# Altium PCB ASR_v2_pcb.PcbDoc
Units mm, origin at the board's own origin, x right, y up, seen from the top; angles counter-clockwise.
Board outline 24 x 105 mm, 2 copper layers (Top Layer, Bottom Layer); 36 components, 27 nets, 99 pads, 34 vias.
Unrouted connection lines stored in the file: 3.
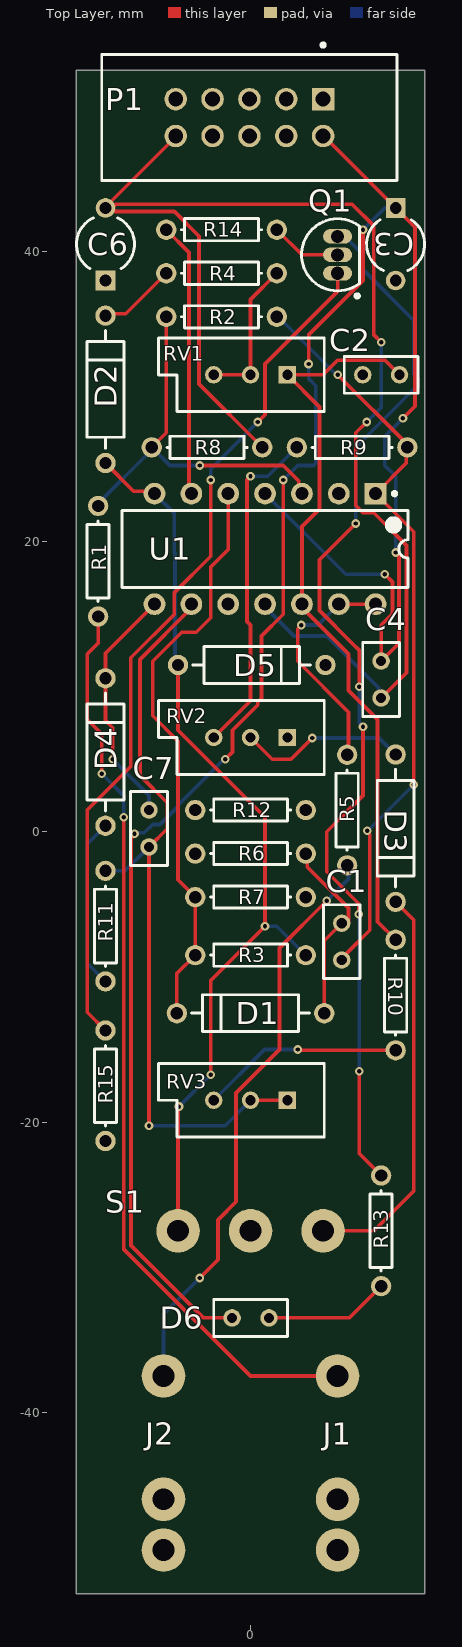
[diagram p0: Top Layer view]
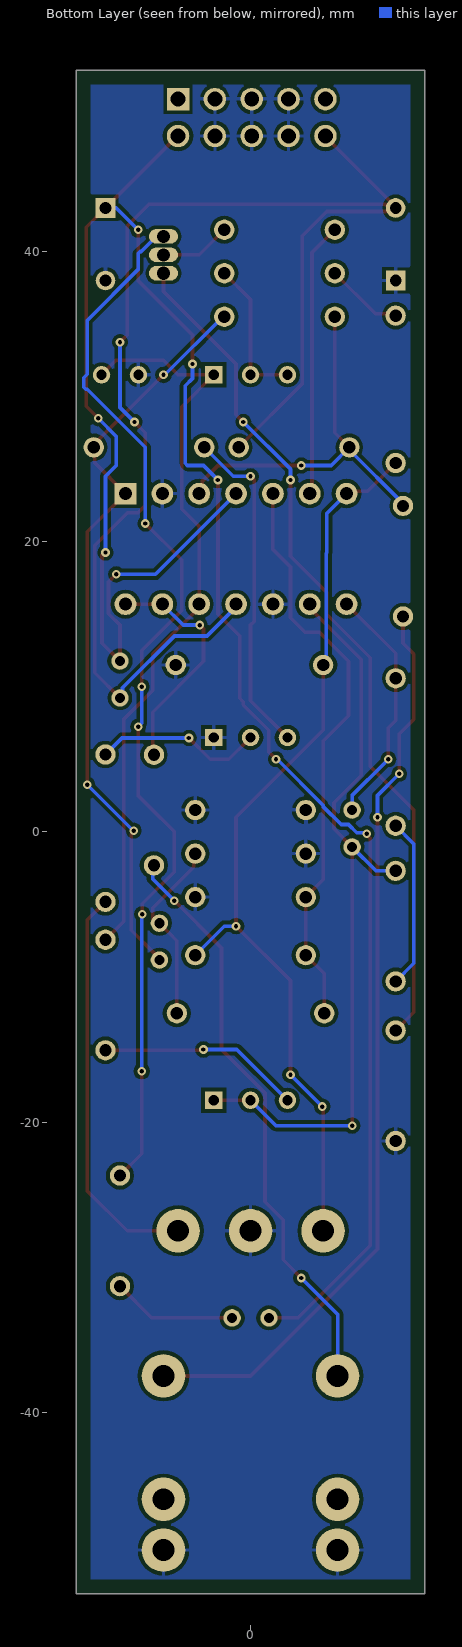
[diagram p1: Bottom Layer view, seen from below]

## Layer stack, top to bottom
Top Solder: solder mask 0.0102, Solder Resist, Dk 3.5
Top Layer: signal copper 0.0356
Dielectric 1: dielectric 0.32, FR-4, Dk 4.8
Bottom Layer: signal copper 0.0356
Bottom Solder: solder mask 0.0102, Solder Resist, Dk 3.5

## Board outline
12,-52.5 12,52.5 -12,52.5 -12,-52.5

## Design rules (kind name [scope] priority, off if disabled: settings)
Clearance [All] p1: gap=0.254 ignorepadtopadclearanceinfootprint=FALSE except(0: Arc-Hole Track-Hole SMDPad-Hole THPad-Hole Via-Hole Fill-Hole Poly-Hole Region-Hole Text-Hole)
PolygonConnect [All] p1: connectstyle=Relief reliefconductorwidth=0.254 reliefentries=4 polygonreliefangle="90 Angle" airgapwidth=0.254
RoutingVias [All] p1: holewidth=0.711 width=1.27 viastyle="Through Hole" minholewidth=0.711 minwidth=1.27 maxholewidth=0.711 maxwidth=1.27
SolderMaskExpansion [All] p1: expansion=0.102 istentingtop=FALSE
Width [All] p1: maxlimit=0.254 minlimit=0.254 preferedwidth=0.254
30 further rules are at their usual default settings.

## Components (designator, comment, footprint, x,y, rotation, side; value= is the part's Value field where it differs from the comment)
C1 "Cap" RAD-0.1 6.285,-7.569 r90 top value=1n
C2 "Cap" RAD-0.1 9,31.5 r180 top value=1u
C3 "Cap Pol1" CAPR5-4X5 10,40.5 r270 top value=10u
C4 "Cap" RAD-0.1 9,10.5 r270 top value=100n
C6 "Cap Pol1" CAPR5-4X5 -10,40.5 r90 top value=10u
C7 "Cap" RAD-0.1 -7,0.23 r270 top value=10n
D1 "Diode" DIODE-0.4 0,-12.5 r180 top
D2 "4148" DIODE-0.4 -10,30.5 r90 top
D3 "4148" DIODE-0.4 10,0.25 r270 top
D4 "4148" DIODE-0.4 -10,5.5 r90 top
D5 "4148" DIODE-0.4 0.08,11.5 r0 top
D6 "LED" RAD-0.1 0,-33.5 r0 top
J1 "Audio Jack" "Audio Jack" 6,-37.5 r180 top
J2 "Audio Jack" "Audio Jack" -6,-37.5 r180 top
P1 "1-1634688-0" TECO-1-1634688-0-10_V -0.08,49.23 r180 top
Q1 "2N3904" TO-92A 6,39.77 r0 top
R1 "Res1" AXIAL-0.3 -10.508,18.653 r90 top value=10k
R2 "Res1" AXIAL-0.3 -2,35.5 r0 top value=1M
R3 "Res1" AXIAL-0.3 0,-8.5 r180 top value=100K
R4 "Res1" AXIAL-0.3 -2,38.5 r180 top value=1K
R5 "Res1" AXIAL-0.3 6.659,1.5 r270 top value=1K
R6 "Res1" AXIAL-0.3 0,-1.5 r180 top value=1M
R7 "Res1" AXIAL-0.3 0,-4.5 r180 top value=220k
R8 "Res1" AXIAL-0.3 -3,26.5 r180 top value=100k
R9 "Res1" AXIAL-0.3 7,26.5 r180 top value=22K
R10 "Res1" AXIAL-0.3 10,-11.25 r90 top value=1K
R11 "Res1" AXIAL-0.3 -10,-6.5 r90 top value=1K
R12 "Res1" AXIAL-0.3 0,1.5 r180 top value=1M
R13 "Res1" AXIAL-0.3 9,-27.5 r90 top value=4.7K
R14 "Res1" AXIAL-0.3 -2,41.5 r180 top value=10K
R15 "Res1" AXIAL-0.3 -10,-17.5 r270 top value=2.2K
RV1 "RPot" VR5 0,31.5 r180 top value=1M
RV2 "RPot" VR5 0,6.5 r180 top value=100k
RV3 "RPot" VR5 0,-18.5 r180 top value=1M
S1 "SW-SPDT" SWITCH 5,-27.5 r90 top
U1 "TL074ACN" N0014A 1,19.5 r270 top

## Footprints (in the part's own frame and the unit in brackets; to place one, negate y for a bottom-side part, rotate by r counter-clockwise, add the part's x,y. Pads: shape width x height; smd on the part's side, far side on the other; paste and mask are expansions set on the pad)
"Audio Jack" [mm]
  round 3 hole 1.5 unplated: 1(0,0) 2(0,8.5) 3(0,12)
AXIAL-0.3 [mm] "Axial Device, Thru-Hole; 2 Leads; 0.3 in Pin Spacing"
  round 1.4 hole 0.85: 1(-3.81,0) 2(3.81,0)
  silkscreen extent -2.77,-0.76 2.77,0.76
CAPR5-4X5 [mm] "Capacitor; 2 Leads"
  rect 1.35x1.35 hole 0.8: 1(-2.5,0)
  round 1.35 hole 0.8: 2(2.5,0)
  silkscreen extent -1.69,-2 1.82,2
DIODE-0.4 [mm] "Diode, Thru-Hole; 2 Leads; 0.4 in Pin Spacing"
  round 1.4 hole 0.85: 1(-5.08,0) 2(5.08,0)
  silkscreen extent -4.06,-1.27 4.06,1.27
N0014A [mm] "DIP, 14-Leads, Body 19.7x6.6mm, Pitch 2.54mm"
  rect 1.5x1.5 hole 0.9: 1(-3.81,7.62)
  round 1.5 hole 0.9: 2(-3.81,5.08) 3(-3.81,2.54) 4(-3.81,0) 5(-3.81,-2.54) 6(-3.81,-5.08) 7(-3.81,-7.62) 8(3.81,-7.62) 9(3.81,-5.08) 10(3.81,-2.54) 11(3.81,0) 12(3.81,2.54) 13(3.81,5.08) 14(3.81,7.62)
  silkscreen extent -3.93,-9.85 2.65,9.85, body extent -3.95,-9.85 3.95,9.85, height 5.08
RAD-0.1 [mm] "Radial Cap, Thru-Hole; 2 Leads; 0.1 in Pin Spacing"
  round 1.2 hole 0.7: 1(-1.27,0) 2(1.27,0)
  silkscreen extent -2.54,-1.27 2.54,1.27
SWITCH [mm]
  round 3 hole 1.5 unplated: 1(0,0) 2(0,5) 3(0,10)
TECO-1-1634688-0-10_V [mm] "10-Pin Connector, Body 20.35x8.7mm, Pitch 2.54mm"
  rect 1.55x1.55 hole 1.02: 1(-5.08,-1.27)
  round 1.55 hole 1.02: 2(-5.08,1.27) 3(-2.54,-1.27) 4(-2.54,1.27) 5(0,-1.27) 6(0,1.27) 7(2.54,-1.27) 8(2.54,1.27) 9(5.08,-1.27) 10(5.08,1.27)
  silkscreen extent -10.18,-5.12 10.18,4.35, body extent -10.17,-4.35 10.18,4.65, height 9
TO-92A [mm] "TO, Flat Index; 3 In-Line, Axial Leads; Body Dia. 4.5mm; Leads 0.51 x 0.48 mm (max)"
  oval 2x1 hole 0.9: 1(0,-1.27) 2(0,0) 3(0,1.27)
  silkscreen extent -2.48,-2.95 1.5,2.48, body extent -2.48,-2.5 1.5,2.5, height 6.86
VR5 [mm] "Thru-Hole; 3 Leads"
  rect 1.2x1.2 hole 0.7: 1(-2.54,0)
  round 1.2 hole 0.7: 2(0,0) 3(2.54,0)
  silkscreen extent -5.08,-2.54 6.35,2.54

## Part data
C1 C2 C4 C7: "Capacitor", LatestRevisionDate=17-Jul-2002, LatestRevisionNote="Re-released for DXP Platform.", PackageDescription="Radial Cap, Thru-Hole; 2 Leads; 0.3 in Pin Spacing", PackageReference=RAD-0.3, Published=8-Jun-2000, Publisher="Altium Limited"
C3 C6: "Polarized Capacitor (Radial)", LatestRevisionDate=17-Jul-2002, LatestRevisionNote="Re-released for DXP Platform.", PackageDescription="Polarized Capacitor (Radial); 2 Leads", PackageReference=RB7.6-15, Published=8-Jun-2000, Publisher="Altium Limited"
D1: "Default Diode", Code_JEDEC=DO-214-AB, LatestRevisionDate=17-Jul-2002, LatestRevisionNote="Re-released for DXP Platform.", PackageDescription="DO-214-AB/SMC; 2 C-Bend Leads; Body 7.9 x 5.9 mm, inc. leads (LxW)", PackageReference=SMC, PackageVersion=Sep-1996, Published=8-Jun-2000, Publisher="Altium Limited"
D2 D3 D4 D5: library part Diode, "Default Diode", Code_JEDEC=DO-214-AB, LatestRevisionDate=17-Jul-2002, LatestRevisionNote="Re-released for DXP Platform.", PackageDescription="DO-214-AB/SMC; 2 C-Bend Leads; Body 7.9 x 5.9 mm, inc. leads (LxW)", PackageReference=SMC, PackageVersion=Sep-1996, Published=8-Jun-2000, Publisher="Altium Limited"
D6: library part LED0, "Typical INFRARED GaAs LED", LatestRevisionDate=08-Jul-2005, LatestRevisionNote="Mech Layer 1 removed.", PackageDescription="LED; 2 Leads", PackageReference=LED-0, Published=8-Jun-2000, Publisher="Altium Limited"
P1: library part CMP-2000-05854-1, "Male Header, Pitch 2.54 mm, 2 x 5 Postion, Height 9.15 mm, Tail Length 3.2 mm, -40 to 105 degC, RoHS, Bulk", Manufacturer="TE Connectivity", Package Description="10-Pin Connector, Body 20.35 x 8.7 mm, Pitch 2.54 mm", Package Version="Rev. C2, 02/2011", Contact Material=Brass, Contact Plating=GoldPlatedContacts, Contact Termination Type=ThroughHole, Datasheet URL=https://datasheet.ciiva.com/6831/eng-cd-1634688-c2-6831201.pdf, Datasheet Version="Rev. C2, 02/2011", Gender=Header, Manufacturer URL=http://www.te.com/, Mounting Technology=ThroughHole, No. of Contacts=10Contacts, No. of Positions=10, No. of Rows=2, Orientation=Straight, Package Reference=1-1634688-0, Package URL=https://datasheet.ciiva.com/6831/eng-cd-1634688-c2-6831201.pdf, PartNumber=1-1634688-0, Pitch=2.54mm, Pitch Spacing=2.54mm, Product Range=-, SVHC=ToBeAdvised
Q1: "NPN General Purpose Amplifier", ComponentLink1Description="Manufacturer Link", ComponentLink1URL=http://www.fairchildsemi.com/, ComponentLink2Description=Datasheet, ComponentLink2URL=http://www.fairchildsemi.com/ds/2N%2F2N3904.pdf, DatasheetVersion=1997, LatestRevisionDate=15-Jan-2003, LatestRevisionNote="PCB Footprint 'BCY-W3/D4.7' replaced", PackageDescription="TO, Flat Index; 3 In-Line, Axial Leads; Body Dia. 4.5mm; Leads 0.51 x 0.48 mm (max)", PackageReference=TO-92A, PackageVersion=Sep-1998, Published=8-Jun-2000, Publisher="Altium Limited"
R1 R2 R3 R4 R5 R6 R7 R8 R9 R10 R11 R12 R13 R14 R15: "Resistor", LatestRevisionDate=17-Jul-2002, LatestRevisionNote="Re-released for DXP Platform.", PackageDescription="Axial Device, Thru-Hole; 2 Leads; 0.3 in Pin Spacing", PackageReference=AXIAL-0.3, Published=8-Jun-2000, Publisher="Altium Limited"
RV1 RV2 RV3: "Potentiometer", LatestRevisionDate=17-Jul-2002, LatestRevisionNote="Re-released for DXP Platform.", PackageDescription="Variable Resistor, Thru-Hole; 3 Leads", PackageReference=VR5, Published=8-Jun-2000, Publisher="Altium Limited", Set Position=0.5, Sim Note="Enter the Resistance value and the set point into parameter fields."
S1: "SPDT Subminiature Toggle Switch, Right Angle Mounting, Vertical Actuation", ComponentLink1Description="Manufacturer Link", ComponentLink1URL=http://www.apem.com, DatasheetVersion=05-Dec-2000, LatestRevisionDate=17-Dec-2003, LatestRevisionNote="Schematic revised, PCB Footprint replaced.", PackageDescription="Switch; 4 Leads", PackageReference=TL36WW15050, Published=24-Mar-1999, Publisher="Altium Limited"
U1: library part CMP-0015-00134-2, "Low-Noise JFET-Input Operational Amplifier, 7 to 36 V, 0 to 70 degC, 14-pin DIP (N14), Pb-Free (RoHS)", Manufacturer="Texas Instruments", Rating=Catalog, Total Supply Voltage(Max)(+5V is 5, +/-5V is 10)=36, Total Supply Voltage(Min)(+5V is 5, +/-5V is 10)=7, CMRR(Min)(dB)=75, Code_JEDEC=MS-001, ComponentLink1Description="Manufacturer URL", ComponentLink1URL=http://www.ti.com/, ComponentLink2Description=Datasheet, ComponentLink2URL=http://www.ti.com/lit/ds/symlink/tl074a.pdf, ComponentLink3Description="Package Specification", ComponentLink3URL=http://www.ti.com/lit/ml/mpdi002c/mpdi002c.pdf, DatasheetVersion=SLOS080J, Eco-Plan="Pb-Free (RoHS)", GBW(Typ)(MHz)=3, IIB(Max)(pA)=200, Iq per channel(Max)(mA)=2.5, Mounting Technology="Through Hole", Number of Channels=4, Offset Drift(Typ)(uV/C)=18, PackageDescription="14-Pin Plastic In-Line, Body 19.305 x 6.35 mm, Pitch 2.54 mm", PackageReference=N0014A, PackageVersion="4040049/E, 12/2002", PartNumber=TL074ACN, Slew Rate(Typ)(V/us)=13, Sub Family="General Purpose Amplifier, High Supply Voltage Amplifier (>=30V)", Vio (25C)(Max)(mV)=6, Vn at 1kHz(Typ)(nV/rtHz)=18

## Via types
v1: diameter 0.6, hole 0.3, Top Layer to Bottom Layer, 34 vias

## Nets (pads, with @x,y where several pads share a name; then routed paths per layer and width w, separated by ;. In a path a pad name is that pad's centre, name@x,y a point inside that pad or via, vN(x,y) a via of type N, cw(c..) or ccw(c..) an arc to the next point about the centre after c; other vN are vias at no path point)
+12V: C3.1 C4.1 D6.1 P1.1 P1.2 U1.4 | length 147.7
  Top Layer w0.254: v1(-8,-0.125) -8,-0.219 -8.242,-0.461 -8.242,-28.508 -3.25,-33.5 D6.1 ; v1(-1.75,5) -1.25,5.5 -1.25,7 0.5,8.75 0.5,8.95 0.75,9.2 0.75,13.5 2.25,15 2.25,23.882 ; v1(4,32.25) 4,34.25 7.75,38 v1(7.75,41.5) ; P1.2 5.04,47.96 C3.1 11.331,41.669 11.331,29.331 v1(10.5,28.5) ; v1(9.25,17.75) 9.785,17.215 9.785,15.035 9,14.25 C4.1 9.004,11.77 10.234,13 10.234,19.101 10.085,19.25 v1(10,19.25)
  Bottom Layer w0.254: v1(-8,-0.125) -7.944,-0.069 -7.319,-0.069 -6.75,0.5 -6.25,0.5 -5,1.75 -5,1.839 -1.839,5 v1(-1.75,5) ; U1.4 6.56,17.75 v1(9.25,17.75) ; v1(2.25,24.25) 3.25,25.25 4.351,25.25 4.5,25.399 4.5,30.75 4,31.25 v1(4,32.25) ; v1(7.75,41.5) 9.25,43 C3.1 ; v1(10,19.25) 10,24.5 9.25,25.25 9.25,27.25 v1(10.5,28.5)
-12V: C4.2 C6.2 P1.9 P1.10 R8.1 U1.11 | length 96.7
  Top Layer w0.254: P1.10 -5.16,47.9 C6.2@-9.81,43.25 ; R8.1 -3.553,30.863 -3.553,41.053 -5.25,42.75 -9.303,42.75 -9.343,42.79 -9.79,42.79 C6.2 -10,43.06 C6.2@-9.81,43.25 ; v1(8,28.25) 7.25,27.5 7.25,22.5 7.75,22 8.484,22 10.742,19.742 10.742,10.972 C4.2 ; v1(9,33.75) 8.5,34.25 8.5,41.75 7,43.25 -9.303,43.25 -9.343,43.21 -9.77,43.21 C6.2@-9.81,43.25
  Bottom Layer w0.254: U1.11 1,15.5 3,13.5 5.25,13.5 8.82,9.93 8.82,9.41 C4.2 ; v1(8,28.25) 9,29.25 v1(9,33.75)
GND: C2.2 C3.2 C6.1 D5.2 J1.3 J2.3 P1.3 P1.4 P1.5 P1.6 P1.7 P1.8 R6.2 R7.1 R12.1 R12.2 R15.2 RV2.1 S1.2 U1.2 U1.10
NetC1_1: C1.1 R2.2 R9.1 U1.1 | length 51.9
  Top Layer w0.254: v1(6,31.5) 10.81,26.69 R9.1 10.729,26.419 10.729,25.419 U1.1 11.25,20.68 v1(11.25,3.25) ; C1.1@6.549,-8.451 8.221,-6.779 8.221,-0.185 8.048,-0.012 v1(8.048,0.081)
  Bottom Layer w0.254: R2.2 1.906,35.5 5.906,31.5 v1(6,31.5) ; v1(8.048,0.081) 8.081,0.081 v1(11.25,3.25)
NetC1_2: C1.2 D1.1 R6.1 | length 12.8
  Top Layer w0.254: R6.1 3.915,-1.605 3.915,-2.415 6.75,-5.25 6.75,-6.229 C1.2@6.659,-6.32 ; D1.1 5.08,-7.504 5.56,-7.024 5.874,-6.71 C1.2@6.52,-6.71
NetC2_1: C2.1 R10.2 RV1.1 U1.12 | length 51.6
  Top Layer w0.254: R10.2 8.75,-6.19 8.75,7.75 6.75,9.75 6.75,12.25 3.54,15.46 U1.12 3.54,21.04 4.75,22.25 4.75,29.29 RV1.1 5,31.5 6,32.5 9.27,32.5 C2.1
NetC3_2: 
NetC7_1: C7.1 D4.2 U1.8 | length 16.5
  Top Layer w0.254: v1(-9.5,5) -9.5,7.182 -10,7.682 D4.2 -10,12.31 U1.8
  Bottom Layer w0.254: -9.25,4.75 -7,2.5 C7.1
NetC7_2: C7.2 R11.2 RV3.1 RV3.2 U1.9 | length 52.7
  Top Layer w0.254: v1(-7,-20.25) C7.2 -5.75,0.21 -5.75,2 -7.625,3.875 -7.625,11.875 -4.08,15.42 U1.9 ; RV3.2 RV3.1
  Bottom Layer w0.254: R11.2 -8.65,-2.69 C7.2 ; v1(-7,-20.25) -1.75,-20.25 RV3.2
NetD1_2: D1.2 R3.2 R7.2 U1.5 | length 40.3
  Top Layer w0.254: D1.2 -5.08,-9.77 R3.2 R7.2 -5,-3.31 -5,6.25 -6.75,8 -6.75,11.75 -4.75,13.75 -3.75,13.75 -2.75,14.75 -2.75,18.25 -1.54,19.46 U1.5
NetD2_1: D2.1 D5.1 R3.1 S1.3 U1.7 | length 64.3
  Top Layer w0.254: D2.1 -8.061,23.481 -6.791,23.481 U1.7 ; S1.3 -5,-19 v1(-4.937,-18.937) ; D5.1 -5,7 1,1 v1(1,-6.5) -2.75,-10.25 v1(-2.75,-16.75)
  Bottom Layer w0.254: U1.7 -5.25,21.94 -5.25,19.25 -5.211,19.211 -5.211,11.711 D5.1 ; v1(-4.937,-18.937) v1(-2.75,-16.75) ; v1(1,-6.5) 1.81,-6.5 R3.1
NetD2_2: D2.2 R4.2 | length 5.4
  Top Layer w0.254: D2.2 -9.879,35.701 -8.609,35.701 R4.2
NetD3_1: D3.1 RV2.2 | length 11.6
  Top Layer w0.254: RV2.2@0.25,6.5 0.25,6.25 1.5,5 2.779,5 v1(4.25,6.471)
  Bottom Layer w0.254: v1(4.25,6.471) 8.859,6.471 D3.1
NetD3_2: D3.2 S1.1 | length 27.8
  Top Layer w0.254: S1.1 8.5,-27.5 11.25,-24.75 11.25,-6.08 D3.2
NetD4_1: D4.1 R11.1 | length 11.8
  Bottom Layer w0.254: R11.1 -11.25,-9.06 -11.25,-0.83 D4.1
NetD6_2: D6.2 R13.1 | length 8.6
  Top Layer w0.254: D6.2 6.81,-33.5 R13.1
NetJ1_1: J1.1 R1.1 | length 63.3
  Top Layer w0.254: R1.1 -10.508,12.992 -11.25,12.25 -11.25,7.75 -10.25,6.75 v1(-10.25,4) ; v1(-8.75,1) -8.75,-28.75 0,-37.5 J1.1
  Bottom Layer w0.254: v1(-10.25,4) -8.75,2.5 v1(-8.75,1)
NetJ2_1: J2.1 R5.2 | length 40.5
  Top Layer w0.254: v1(-3.5,-30.75) -2.25,-29.5 -2.25,-26.75 -1,-25.5 -1,-18 2,-15 2,-8 v1(5.25,-4.75)
  Bottom Layer w0.254: J2.1 -6,-33.25 v1(-3.5,-30.75) ; v1(5.25,-4.75) 6.75,-3.25 R5.2@6.75,-2.25
NetQ1_1: Q1.1 R15.1 | length 59.9
  Top Layer w0.254: R15.1 -11.25,-12.44 -11.25,1.5 -8.25,4.5 -8.25,12 -5.25,15 -5.25,16.5 -2.75,19 v1(-2.75,24.25) ; v1(0.5,28.25) 1,28.75 1,32.25 6,37.25 Q1.1
  Bottom Layer w0.254: v1(-2.75,24.25) -2.75,25 v1(0.5,28.25)
NetQ1_2: Q1.2 R14.1 | length 4.9
  Top Layer w0.254: R14.1 3.54,39.77 Q1.2
NetQ1_3: Q1.3 R13.2 | length 74
  Top Layer w0.254: v1(7.25,21.25) 4.75,18.75 4.75,15.25 7,13 7.5,12.5 v1(7.5,10) ; v1(7.459,-5.679) 7.459,-4.959 5.25,-2.75 5.25,0 7,1.75 7.75,2.5 v1(7.75,7.25) ; v1(7.5,-16.5) 7.5,-22.19 R13.2
  Bottom Layer w0.254: Q1.3 6.5,41.04 7.54,40 7.601,40 7.75,39.851 7.75,38.75 11.25,35.25 11.25,31.544 11.5,31.294 11.5,30.649 11.351,30.5 11.25,30.5 7.25,26.5 v1(7.25,21.25) ; v1(7.459,-5.679) 7.5,-5.72 v1(7.5,-16.5) ; v1(7.5,10) 7.5,7.5 v1(7.75,7.25)
NetR1_2: R1.2 R2.1 R8.2 U1.3 | length 27
  Top Layer w0.254: R8.2 -5.81,27.5 R2.1 ; v1(-3.5,25.25) 2.25,25.25 3.319,24.181 3.319,23.531 U1.3
  Bottom Layer w0.254: R1.2 -10.508,22.632 -6.81,26.33 R8.2 -5.56,25.25 v1(-3.5,25.25)
NetR4_1: R4.1 RV1.2 RV1.3 | length 10.3
  Top Layer w0.254: RV1.3 RV1.2 0,36.69 R4.1
NetR5_1: R5.1 U1.13 U1.14 | length 16.2
  Top Layer w0.254: v1(3.5,14.25) 3.25,14 3.25,11.75 6.75,8.25 6.75,5.401 R5.1 ; U1.13 U1.14
  Bottom Layer w0.254: v1(3.5,14.25) 4.64,14.25 U1.13
NetR9_2: R9.2 RV2.3 | length 23.3
  Top Layer w0.254: RV2.3 0,9.04 0,14.25 -0.25,14.5 -0.25,24.25 v1(0,24.5)
  Bottom Layer w0.254: v1(0,24.5) 1.19,24.5 R9.2
NetR10_1: R10.1 RV3.3 | length 13.8
  Top Layer w0.254: v1@3.44,-15.06 R10.1
  Bottom Layer w0.254: RV3.3 0.96,-15 v1(3.25,-15)
NetR14_2: R14.2 U1.6 | length 18.9
  Top Layer w0.254: R14.2 -4.237,39.927 -4.237,23.467 U1.6
pads on no net: J1.2 J2.2

## Polygon pours and split planes (outlines as drawn)
GND on Bottom Layer "GND_L02_P002" (solid, remove dead copper, pour order 2): 60,-15.5
GND on Bottom Layer "GND_L02_P001" (solid, remove dead copper, pour order 1): -11,-51.5 -11,51.5 11,51.5 11,-51.5